# EAGLE board SiNEProduction-Panel (EAGLE 6.1)
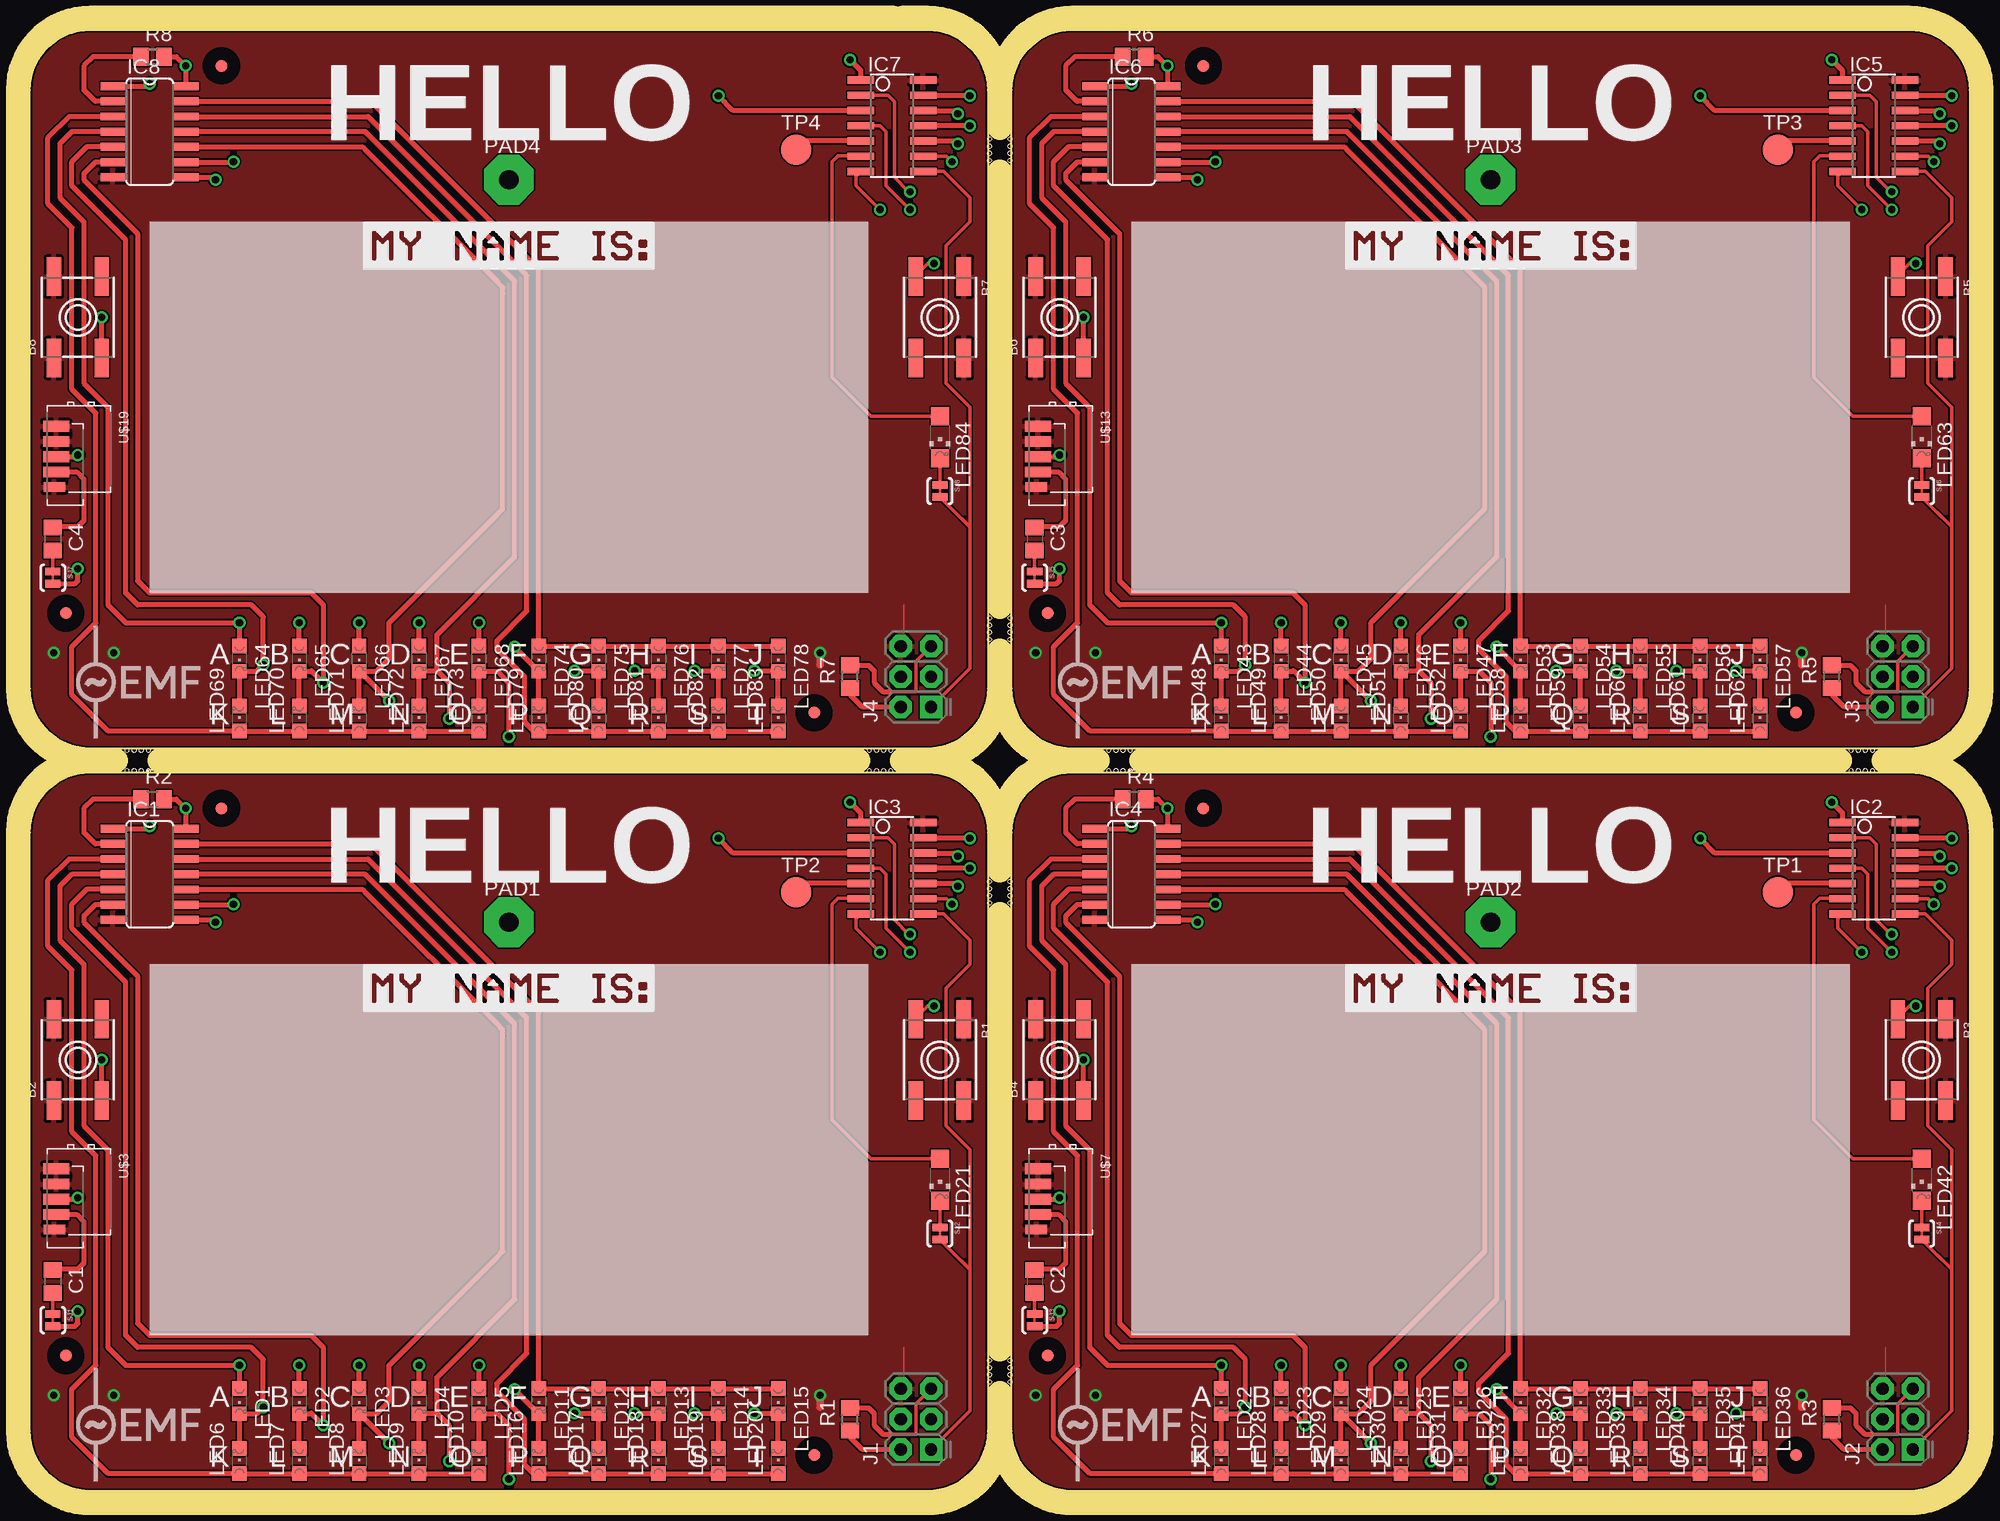
[diagram p0: board, top side]
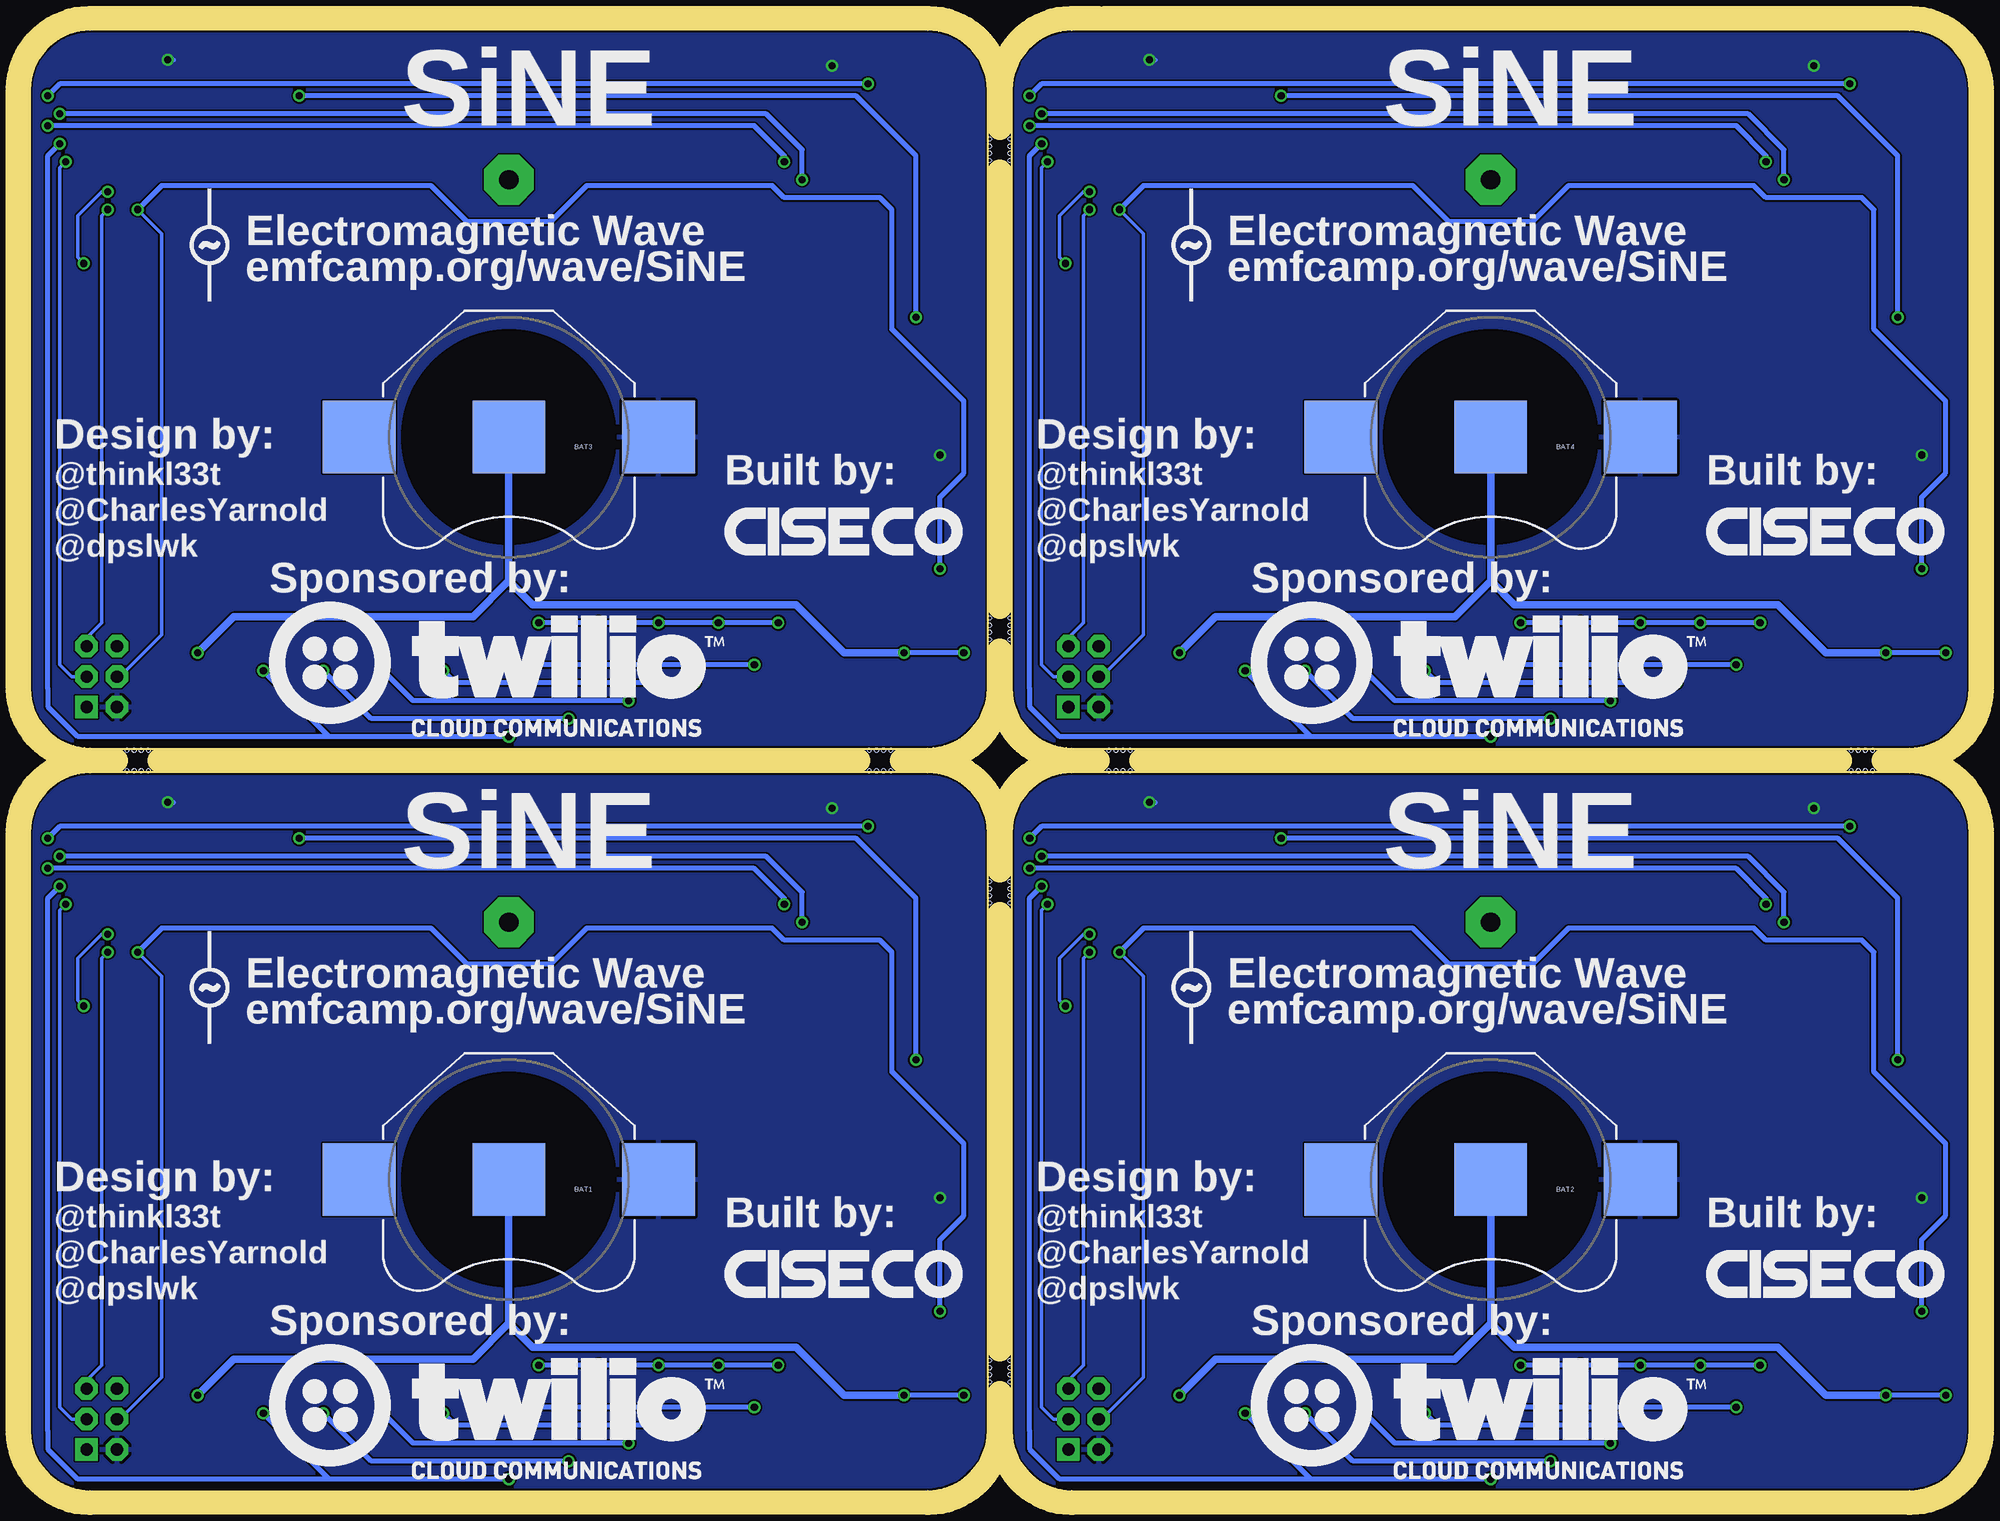
[diagram p1: board, bottom side, seen from below]

Size 162 x 122 mm. Coordinates in mm from the lower left corner, seen from the top.
Outline: 80,55 80,5 arc-90 75,0 5,0 arc-90 0,5 0,55 arc-90 5,60 75,60 arc-90 80,55
Outline: 162,55 162,5 arc-90 157,0 87,0 arc-90 82,5 82,55 arc-90 87,60 157,60 arc-90 162,55
Outline: 162,117 162,67 arc-90 157,62 87,62 arc-90 82,67 82,117 arc-90 87,122 157,122 arc-90 162,117
Outline: 80,117 80,67 arc-90 75,62 5,62 arc-90 0,67 0,117 arc-90 5,122 75,122 arc-90 80,117
Copper layers (1*16): Top 0.035mm / dielectric 1mm / Bottom 0.035mm
Design rules: minimum track width 0.15mm, minimum drill 0.3mm, track to track 0.15mm, track to pad 0.15mm, pad to pad 0.15mm, via to via 0.15mm, smd to smd 0mil, copper to edge 0.15mm, drill to drill 0.15mm, minimum pad ring 10mil, minimum via ring 8mil, stop-mask expansion 4mil, vias tented up to drill 0.61mm, thermal gap 10mil
Holes 0.3 mm at 9.9,60.15 9.3,60.15 8.7,60.15 8.1,60.15 71.9,60.15 71.3,60.15 70.7,60.15 70.1,60.15 80.15,9.1 80.15,9.7 80.15,10.3 80.15,10.9 80.15,49.1 80.15,49.7 80.15,50.3 80.15,50.9 91.9,60.15 91.3,60.15 90.7,60.15 90.1,60.15 153.9,60.15 153.3,60.15 152.7,60.15 152.1,60.15 81.85,50.9 81.85,50.3 81.85,49.7 81.85,49.1 81.85,10.9 81.85,10.3 81.85,9.7 81.85,9.1 8.1,61.85 8.7,61.85 9.3,61.85 9.9,61.85 70.1,61.85 70.7,61.85 71.3,61.85 71.9,61.85 80.15,71.1 80.15,71.7 80.15,72.3 80.15,72.9 80.15,111.1 80.15,111.7 80.15,112.3 80.15,112.9 90.1,61.85 90.7,61.85 91.3,61.85 91.9,61.85 152.1,61.85 152.7,61.85 153.3,61.85 153.9,61.85 81.85,112.9 81.85,112.3 81.85,111.7 81.85,111.1 81.85,72.9 81.85,72.3 81.85,71.7 81.85,71.1
bRestrict: area 31,17 to 49,35; area 113,17 to 131,35; area 113,79 to 131,97; area 31,79 to 49,97
Milling: 39 lines

## Footprints (pad centres in the part's own frame; a part is rotated, then mirrored left to right if it is on the bottom)
EVQ-Q2 = smd 3.2 x 1.2: A -3.4,-2; A' 3.4,-2; B -3.4,2; B' 3.4,2
BATTCON_20MM = smd 6.07 x 6.07: 1 -12.5,0; 2 0,0; 3 12.5,0
C0805 = smd 1.3 x 1.5: 1 -0.95,0; 2 0.95,0
SO14 = smd 0.66 x 2.032: 1 -3.81,-3.073; 2 -2.54,-3.073; 3 -1.27,-3.073; 4 0,-3.073; 5 1.27,-3.073; 6 2.54,-3.073; 7 3.81,-3.073; 8 3.81,3.073; 9 2.54,3.073; 10 1.27,3.073; 11 0,3.073; 12 -1.27,3.073; 13 -2.54,3.073; 14 -3.81,3.073
SOIC14 = smd 0.61 x 2.21: 1 -3.81,-2.603; 2 -2.54,-2.603; 3 -1.27,-2.603; 4 0,-2.603; 5 1.27,-2.603; 6 2.54,-2.603; 7 3.81,-2.603; 8 3.81,2.603; 9 2.54,2.603; 10 1.27,2.603; 11 0,2.603; 12 -1.27,2.603; 13 -2.54,2.603; 14 -3.81,2.603
2X3-NS = drill 1.016 pad 1.88 square: 1 -2.54,-1.27 | drill 1.016 pad 1.88 octagon: 2 -2.54,1.27; 3 0,-1.27; 4 0,1.27; 5 2.54,-1.27; 6 2.54,1.27
FIDUCIAL-1X2.5-STOP = smd 1 x 1: 1 0,0
CHIPLED_0805 = smd 1.2 x 1.2: A 0,-1.05; C 0,1.05
CHIPLED_1206 = smd 1.5 x 1.5: A 0,-1.75; C 0,1.75
4,16O1,6 = drill 1.6 pad 4.166 octagon: 1 0,0
R0805 = smd 1.3 x 1.5: 1 -0.95,0; 2 0.95,0
SJ_2S-TRACE = smd 0.635 x 1.27: 1 -0.508,0; 2 0.508,0
B2,54 = smd 2.54 x 2.54: TP 0,0
TSOP-COMBINED = smd 0.9 x 2.2: 1 -1.905,-2.055; 2 -0.635,-2.055; 3 0.635,-2.055; 4 1.905,-2.055 | smd 0.8 x 1.8: 5 3.175,-2.2

## Placement (x,y rotation side)
B1  SWICTH_SMD  [EVQ-Q2]  76,36 270 top
B2  SWITCH_SMD  [EVQ-Q2]  4,36 90 top
B3  SWICTH_SMD  [EVQ-Q2]  158,36 270 top
B4  SWITCH_SMD  [EVQ-Q2]  86,36 90 top
B5  SWICTH_SMD  [EVQ-Q2]  158,98 270 top
B6  SWITCH_SMD  [EVQ-Q2]  86,98 90 top
B7  SWICTH_SMD  [EVQ-Q2]  76,98 270 top
B8  SWITCH_SMD  [EVQ-Q2]  4,98 90 top
BAT1  [BATTCON_20MM]  122,26 180 bottom
BAT2  [BATTCON_20MM]  40,26 180 bottom
BAT3  [BATTCON_20MM]  122,88 180 bottom
BAT4  [BATTCON_20MM]  40,88 180 bottom
C1  0603 100nF  [C0805]  1.92,17.5 270 top
C2  0603 100nF  [C0805]  83.92,17.5 270 top
C3  0603 100nF  [C0805]  83.92,79.5 270 top
C4  0603 100nF  [C0805]  1.92,79.5 270 top
IC1  74HCT164D  [SO14]  10,51.5 270 top
IC2  ATTINY24/44/84-SSU  [SOIC14]  154,52 270 top
IC3  ATTINY24/44/84-SSU  [SOIC14]  72,52 270 top
IC4  74HCT164D  [SO14]  92,51.5 270 top
IC5  ATTINY24/44/84-SSU  [SOIC14]  154,114 270 top
IC6  74HCT164D  [SO14]  92,113.5 270 top
IC7  ATTINY24/44/84-SSU  [SOIC14]  72,114 270 top
IC8  74HCT164D  [SO14]  10,113.5 270 top
J1  AVR_SPI_PRG_6NS  [2X3-NS]  74,6 90 top
J2  AVR_SPI_PRG_6NS  [2X3-NS]  156,6 90 top
J3  AVR_SPI_PRG_6NS  [2X3-NS]  156,68 90 top
J4  AVR_SPI_PRG_6NS  [2X3-NS]  74,68 90 top
JP1  FIDUCIAL1X2.5-STOP  [FIDUCIAL-1X2.5-STOP]  65.5,3 0 top
JP2  FIDUCIAL1X2.5-STOP  [FIDUCIAL-1X2.5-STOP]  16,57 0 top
JP3  FIDUCIAL1X2.5-STOP  [FIDUCIAL-1X2.5-STOP]  3,11.3 0 top
JP4  FIDUCIAL1X2.5-STOP  [FIDUCIAL-1X2.5-STOP]  147.5,3 0 top
JP5  FIDUCIAL1X2.5-STOP  [FIDUCIAL-1X2.5-STOP]  98,57 0 top
JP6  FIDUCIAL1X2.5-STOP  [FIDUCIAL-1X2.5-STOP]  85,11.3 0 top
JP7  FIDUCIAL1X2.5-STOP  [FIDUCIAL-1X2.5-STOP]  147.5,65 0 top
JP8  FIDUCIAL1X2.5-STOP  [FIDUCIAL-1X2.5-STOP]  98,119 0 top
JP9  FIDUCIAL1X2.5-STOP  [FIDUCIAL-1X2.5-STOP]  85,73.3 0 top
JP10  FIDUCIAL1X2.5-STOP  [FIDUCIAL-1X2.5-STOP]  65.5,65 0 top
JP11  FIDUCIAL1X2.5-STOP  [FIDUCIAL-1X2.5-STOP]  16,119 0 top
JP12  FIDUCIAL1X2.5-STOP  [FIDUCIAL-1X2.5-STOP]  3,73.3 0 top
LED1  0805 LED  [CHIPLED_0805]  17.5,7.5 180 top
LED2  0805 LED  [CHIPLED_0805]  22.5,7.5 180 top
LED3  0805 LED  [CHIPLED_0805]  27.5,7.5 180 top
LED4  0805 LED  [CHIPLED_0805]  32.5,7.5 180 top
LED5  0805 LED  [CHIPLED_0805]  37.5,7.5 180 top
LED6  0805 LED  [CHIPLED_0805]  17.5,2.5 0 top
LED7  0805 LED  [CHIPLED_0805]  22.5,2.5 0 top
LED8  0805 LED  [CHIPLED_0805]  27.5,2.5 0 top
LED9  0805 LED  [CHIPLED_0805]  32.5,2.5 0 top
LED10  0805 LED  [CHIPLED_0805]  37.5,2.5 0 top
LED11  0805 LED  [CHIPLED_0805]  42.5,7.5 180 top
LED12  0805 LED  [CHIPLED_0805]  47.5,7.5 180 top
LED13  0805 LED  [CHIPLED_0805]  52.5,7.5 180 top
LED14  0805 LED  [CHIPLED_0805]  57.5,7.5 180 top
LED15  0805 LED  [CHIPLED_0805]  62.5,7.5 180 top
LED16  0805 LED  [CHIPLED_0805]  42.5,2.5 0 top
LED17  0805 LED  [CHIPLED_0805]  47.5,2.5 0 top
LED18  0805 LED  [CHIPLED_0805]  52.5,2.5 0 top
LED19  0805 LED  [CHIPLED_0805]  57.5,2.5 0 top
LED20  0805 LED  [CHIPLED_0805]  62.5,2.5 0 top
LED21  IR_SENDER  [CHIPLED_1206]  76,26 180 top
LED22  0805 LED  [CHIPLED_0805]  99.5,7.5 180 top
LED23  0805 LED  [CHIPLED_0805]  104.5,7.5 180 top
LED24  0805 LED  [CHIPLED_0805]  109.5,7.5 180 top
LED25  0805 LED  [CHIPLED_0805]  114.5,7.5 180 top
LED26  0805 LED  [CHIPLED_0805]  119.5,7.5 180 top
LED27  0805 LED  [CHIPLED_0805]  99.5,2.5 0 top
LED28  0805 LED  [CHIPLED_0805]  104.5,2.5 0 top
LED29  0805 LED  [CHIPLED_0805]  109.5,2.5 0 top
LED30  0805 LED  [CHIPLED_0805]  114.5,2.5 0 top
LED31  0805 LED  [CHIPLED_0805]  119.5,2.5 0 top
LED32  0805 LED  [CHIPLED_0805]  124.5,7.5 180 top
LED33  0805 LED  [CHIPLED_0805]  129.5,7.5 180 top
LED34  0805 LED  [CHIPLED_0805]  134.5,7.5 180 top
LED35  0805 LED  [CHIPLED_0805]  139.5,7.5 180 top
LED36  0805 LED  [CHIPLED_0805]  144.5,7.5 180 top
LED37  0805 LED  [CHIPLED_0805]  124.5,2.5 0 top
LED38  0805 LED  [CHIPLED_0805]  129.5,2.5 0 top
LED39  0805 LED  [CHIPLED_0805]  134.5,2.5 0 top
LED40  0805 LED  [CHIPLED_0805]  139.5,2.5 0 top
LED41  0805 LED  [CHIPLED_0805]  144.5,2.5 0 top
LED42  IR_SENDER  [CHIPLED_1206]  158,26 180 top
LED43  0805 LED  [CHIPLED_0805]  99.5,69.5 180 top
LED44  0805 LED  [CHIPLED_0805]  104.5,69.5 180 top
LED45  0805 LED  [CHIPLED_0805]  109.5,69.5 180 top
LED46  0805 LED  [CHIPLED_0805]  114.5,69.5 180 top
LED47  0805 LED  [CHIPLED_0805]  119.5,69.5 180 top
LED48  0805 LED  [CHIPLED_0805]  99.5,64.5 0 top
LED49  0805 LED  [CHIPLED_0805]  104.5,64.5 0 top
LED50  0805 LED  [CHIPLED_0805]  109.5,64.5 0 top
LED51  0805 LED  [CHIPLED_0805]  114.5,64.5 0 top
LED52  0805 LED  [CHIPLED_0805]  119.5,64.5 0 top
LED53  0805 LED  [CHIPLED_0805]  124.5,69.5 180 top
LED54  0805 LED  [CHIPLED_0805]  129.5,69.5 180 top
LED55  0805 LED  [CHIPLED_0805]  134.5,69.5 180 top
LED56  0805 LED  [CHIPLED_0805]  139.5,69.5 180 top
LED57  0805 LED  [CHIPLED_0805]  144.5,69.5 180 top
LED58  0805 LED  [CHIPLED_0805]  124.5,64.5 0 top
LED59  0805 LED  [CHIPLED_0805]  129.5,64.5 0 top
LED60  0805 LED  [CHIPLED_0805]  134.5,64.5 0 top
LED61  0805 LED  [CHIPLED_0805]  139.5,64.5 0 top
LED62  0805 LED  [CHIPLED_0805]  144.5,64.5 0 top
LED63  IR_SENDER  [CHIPLED_1206]  158,88 180 top
LED64  0805 LED  [CHIPLED_0805]  17.5,69.5 180 top
LED65  0805 LED  [CHIPLED_0805]  22.5,69.5 180 top
LED66  0805 LED  [CHIPLED_0805]  27.5,69.5 180 top
LED67  0805 LED  [CHIPLED_0805]  32.5,69.5 180 top
LED68  0805 LED  [CHIPLED_0805]  37.5,69.5 180 top
LED69  0805 LED  [CHIPLED_0805]  17.5,64.5 0 top
LED70  0805 LED  [CHIPLED_0805]  22.5,64.5 0 top
LED71  0805 LED  [CHIPLED_0805]  27.5,64.5 0 top
LED72  0805 LED  [CHIPLED_0805]  32.5,64.5 0 top
LED73  0805 LED  [CHIPLED_0805]  37.5,64.5 0 top
LED74  0805 LED  [CHIPLED_0805]  42.5,69.5 180 top
LED75  0805 LED  [CHIPLED_0805]  47.5,69.5 180 top
LED76  0805 LED  [CHIPLED_0805]  52.5,69.5 180 top
LED77  0805 LED  [CHIPLED_0805]  57.5,69.5 180 top
LED78  0805 LED  [CHIPLED_0805]  62.5,69.5 180 top
LED79  0805 LED  [CHIPLED_0805]  42.5,64.5 0 top
LED80  0805 LED  [CHIPLED_0805]  47.5,64.5 0 top
LED81  0805 LED  [CHIPLED_0805]  52.5,64.5 0 top
LED82  0805 LED  [CHIPLED_0805]  57.5,64.5 0 top
LED83  0805 LED  [CHIPLED_0805]  62.5,64.5 0 top
LED84  IR_SENDER  [CHIPLED_1206]  76,88 180 top
PAD1  WIREPAD4,16O1,6  [4,16O1,6]  40,47.5 0 top
PAD2  WIREPAD4,16O1,6  [4,16O1,6]  122,47.5 0 top
PAD3  WIREPAD4,16O1,6  [4,16O1,6]  122,109.5 0 top
PAD4  WIREPAD4,16O1,6  [4,16O1,6]  40,109.5 0 top
R1  0603 10K  [R0805]  68.5,6 90 top
R2  0603 10K  [R0805]  10.23,57.77 0 top
R3  0603 10K  [R0805]  150.5,6 90 top
R4  0603 10K  [R0805]  92.23,57.77 0 top
R5  0603 10K  [R0805]  150.5,68 90 top
R6  0603 10K  [R0805]  92.23,119.77 0 top
R7  0603 10K  [R0805]  68.5,68 90 top
R8  0603 10K  [R0805]  10.23,119.77 0 top
SJ1  SOLDERJUMPERTRACE (NP)  [SJ_2S-TRACE]  1.92,14.27 270 top
SJ2  SOLDERJUMPERTRACE (NP)  [SJ_2S-TRACE]  76,21.5 270 top
SJ3  SOLDERJUMPERTRACE (NP)  [SJ_2S-TRACE]  83.92,14.27 270 top
SJ4  SOLDERJUMPERTRACE (NP)  [SJ_2S-TRACE]  158,21.5 270 top
SJ5  SOLDERJUMPERTRACE (NP)  [SJ_2S-TRACE]  83.92,76.27 270 top
SJ6  SOLDERJUMPERTRACE (NP)  [SJ_2S-TRACE]  158,83.5 270 top
SJ7  SOLDERJUMPERTRACE (NP)  [SJ_2S-TRACE]  1.92,76.27 270 top
SJ8  SOLDERJUMPERTRACE (NP)  [SJ_2S-TRACE]  76,83.5 270 top
TP1  TPB2,54  [B2,54]  146,50 0 top
TP2  TPB2,54  [B2,54]  64,50 0 top
TP3  TPB2,54  [B2,54]  146,112 0 top
TP4  TPB2,54  [B2,54]  64,112 0 top
U$1  [TWILIO]  60,1 0 bottom
U$2  [EMFLOGO1]  65,42 0 bottom
U$3  IR-RECEIVE-COMBINED  [TSOP-COMBINED]  4.25,25 270 top
U$4  [NAME]  40,42 0 top
U$5  [CISECO1]  22,15 0 bottom
U$6  [EMFLOGO]  5.5,5.5 0 top
U$7  IR-RECEIVE-COMBINED  [TSOP-COMBINED]  86.25,25 270 top
U$8  [TWILIO]  142,1 0 bottom
U$9  [CISECO1]  104,15 0 bottom
U$10  [NAME]  122,42 0 top
U$11  [EMFLOGO]  87.5,5.5 0 top
U$12  [EMFLOGO1]  147,42 0 bottom
U$13  IR-RECEIVE-COMBINED  [TSOP-COMBINED]  86.25,87 270 top
U$14  [TWILIO]  142,63 0 bottom
U$15  [CISECO1]  104,77 0 bottom
U$16  [NAME]  122,104 0 top
U$17  [EMFLOGO]  87.5,67.5 0 top
U$18  [EMFLOGO1]  147,104 0 bottom
U$19  IR-RECEIVE-COMBINED  [TSOP-COMBINED]  4.25,87 270 top
U$20  [TWILIO]  60,63 0 bottom
U$21  [CISECO1]  22,77 0 bottom
U$22  [NAME]  40,104 0 top
U$23  [EMFLOGO]  5.5,67.5 0 top
U$24  [EMFLOGO1]  65,104 0 bottom

## Library data of the parts
B1-B8 = microbuilder
BAT1-BAT4 IC1-IC8 TP1-TP4 U$1-U$24 = SiNE Parts
C1-C4 R1-R8 = rcl
J1-J4 = AVR Header
JP1-JP12 = CISECO eaglecad designs
LED1-LED20 LED22-LED41 LED43-LED62 LED64-LED83 = adafruit
LED21 LED42 LED63 LED84 = led
PAD1-PAD4 = wirepad
SJ1-SJ8 = SparkFun

## Nets
BTN1: B1.A IC3.2
BTN2: B2.A IC3.3
BTN3: B4.A IC2.3
BTN4: B3.A IC2.2
BTN5: B6.A IC5.3
BTN6: B5.A IC5.2
BTN7: B8.A IC7.3
BTN8: B7.A IC7.2
GND: B1.B B1.B' B2.B B2.B' BAT2.2 IC1.7 IC3.14 J1.6 U$3.1 U$3.2 U$3.5
GND1: B3.B B3.B' B4.B B4.B' BAT1.2 IC2.14 IC4.7 J2.6 U$7.1 U$7.2 U$7.5
GND2: B5.B B5.B' B6.B B6.B' BAT3.2 IC5.14 IC6.7 J3.6 U$13.1 U$13.2 U$13.5
GND3: B7.B B7.B' B8.B B8.B' BAT4.2 IC7.14 IC8.7 J4.6 U$19.1 U$19.2 U$19.5
IR_IN: C1.2 SJ1.1
IR_IN1: C2.2 SJ3.1
IR_IN2: C3.2 SJ5.1
IR_IN3: C4.2 SJ7.1
IR_OUT: LED21.C SJ2.1
IR_OUT1: LED42.C SJ4.1
IR_OUT2: LED63.C SJ6.1
IR_OUT3: LED84.C SJ8.1
IR_PWM: IC3.6 LED21.A
IR_PWM1: IC2.6 LED42.A
IR_PWM2: IC5.6 LED63.A
IR_PWM3: IC7.6 LED84.A
LED_C1: IC1.5 LED1.C LED6.C LED11.C LED16.C
LED_C2: IC1.6 LED2.C LED7.C LED12.C LED17.C
LED_C3: IC1.10 LED3.C LED8.C LED13.C LED18.C
LED_C4: IC1.11 LED4.C LED9.C LED14.C LED19.C
LED_C5: IC3.10 LED5.C LED10.C LED15.C LED20.C
LED_C6: IC4.6 LED23.C LED28.C LED33.C LED38.C
LED_C7: IC2.10 LED26.C LED31.C LED36.C LED41.C
LED_C8: IC4.10 LED24.C LED29.C LED34.C LED39.C
LED_C9: IC4.11 LED25.C LED30.C LED35.C LED40.C
LED_C10: IC4.5 LED22.C LED27.C LED32.C LED37.C
LED_C11: IC6.6 LED44.C LED49.C LED54.C LED59.C
LED_C12: IC5.10 LED47.C LED52.C LED57.C LED62.C
LED_C13: IC6.10 LED45.C LED50.C LED55.C LED60.C
LED_C14: IC6.11 LED46.C LED51.C LED56.C LED61.C
LED_C15: IC6.5 LED43.C LED48.C LED53.C LED58.C
LED_C16: IC8.6 LED65.C LED70.C LED75.C LED80.C
LED_C17: IC7.10 LED68.C LED73.C LED78.C LED83.C
LED_C18: IC8.10 LED66.C LED71.C LED76.C LED81.C
LED_C19: IC8.11 LED67.C LED72.C LED77.C LED82.C
LED_C20: IC8.5 LED64.C LED69.C LED74.C LED79.C
LED_R1: IC1.4 LED1.A LED2.A LED3.A LED4.A LED5.A
LED_R2: IC1.3 LED6.A LED7.A LED8.A LED9.A LED10.A
LED_R3: IC1.13 LED11.A LED12.A LED13.A LED14.A LED15.A
LED_R4: IC1.12 LED16.A LED17.A LED18.A LED19.A LED20.A
LED_R5: IC4.4 LED22.A LED23.A LED24.A LED25.A LED26.A
LED_R6: IC4.3 LED27.A LED28.A LED29.A LED30.A LED31.A
LED_R7: IC4.13 LED32.A LED33.A LED34.A LED35.A LED36.A
LED_R8: IC4.12 LED37.A LED38.A LED39.A LED40.A LED41.A
LED_R9: IC6.4 LED43.A LED44.A LED45.A LED46.A LED47.A
LED_R10: IC6.3 LED48.A LED49.A LED50.A LED51.A LED52.A
LED_R11: IC6.13 LED53.A LED54.A LED55.A LED56.A LED57.A
LED_R12: IC6.12 LED58.A LED59.A LED60.A LED61.A LED62.A
LED_R13: IC8.4 LED64.A LED65.A LED66.A LED67.A LED68.A
LED_R14: IC8.3 LED69.A LED70.A LED71.A LED72.A LED73.A
LED_R15: IC8.13 LED74.A LED75.A LED76.A LED77.A LED78.A
LED_R16: IC8.12 LED79.A LED80.A LED81.A LED82.A LED83.A
MISO: IC3.8 J1.1 SJ2.2
MISO1: IC2.8 J2.1 SJ4.2
MISO2: IC5.8 J3.1 SJ6.2
MISO3: IC7.8 J4.1 SJ8.2
MOSI: IC3.7 J1.4 SJ1.2
MOSI1: IC2.7 J2.4 SJ3.2
MOSI2: IC5.7 J3.4 SJ5.2
MOSI3: IC7.7 J4.4 SJ7.2
N$1: IC1.2 R2.1
N$2: IC4.2 R4.1
N$3: C2.1 U$7.4
N$4: IC6.2 R6.1
N$5: C3.1 U$13.4
N$6: C1.1 U$3.4
N$7: IC8.2 R8.1
N$8: C4.1 U$19.4
RESET: IC3.4 J1.5 R1.2
RESET1: IC2.4 J2.5 R3.2
RESET2: IC5.4 J3.5 R5.2
RESET3: IC7.4 J4.5 R7.2
SCK: IC3.9 J1.3
SCK1: IC2.9 J2.3
SCK2: IC5.9 J3.3
SCK3: IC7.9 J4.3
SR_A: IC1.1 IC3.13
SR_A1: IC2.13 IC4.1
SR_A2: IC5.13 IC6.1
SR_A3: IC7.13 IC8.1
SR_CLK: IC1.8 IC3.12
SR_CLK1: IC2.12 IC4.8
SR_CLK2: IC5.12 IC6.8
SR_CLK3: IC7.12 IC8.8
SR_CLR: IC1.9 IC3.11
SR_CLR1: IC2.11 IC4.9
SR_CLR2: IC5.11 IC6.9
SR_CLR3: IC7.11 IC8.9
TESTPAD: IC3.5 TP2.TP
TESTPAD1: IC2.5 TP1.TP
TESTPAD2: IC5.5 TP3.TP
TESTPAD3: IC7.5 TP4.TP
VCC: BAT2.1 IC1.14 IC3.1 J1.2 R1.1 R2.2 U$3.3
VCC1: BAT1.1 IC2.1 IC4.14 J2.2 R3.1 R4.2 U$7.3
VCC2: BAT3.1 IC5.1 IC6.14 J3.2 R5.1 R6.2 U$13.3
VCC3: BAT4.1 IC7.1 IC8.14 J4.2 R7.1 R8.2 U$19.3

## Tracks (layer width: path | path; a pad name or v marks a point on that pad's centre or on a via)
BTN1  (via drill 0.6)
  Top 0.305: IC3.2 71.66,54.54 72.2,54 72.2,47.7 73.4,46.5 v73.5,46.5 | v75.5,40.5 75,40.5 74,39.5 B1.A
  Bottom 0.305: v73.5,46.5 74,46.5 76,44.5 76,41 v75.5,40.5
BTN2  (via drill 0.6)
  Top 0.406: B2.A v6,36 | IC3.3 58.73,53.27 v57.5,54.5
  Bottom 0.406: v6,36 6,49.5 11,54.5 v57.5,54.5
BTN3  (via drill 0.6)
  Top 0.406: B4.A v88,36 | IC2.3 140.73,53.27 v139.5,54.5
  Bottom 0.406: v88,36 88,49.5 93,54.5 v139.5,54.5
BTN4  (via drill 0.6)
  Top 0.305: IC2.2 153.66,54.54 154.2,54 154.2,47.7 155.4,46.5 v155.5,46.5 | v157.5,40.5 157,40.5 156,39.5 B3.A
  Bottom 0.305: v155.5,46.5 156,46.5 158,44.5 158,41 v157.5,40.5
BTN5  (via drill 0.6)
  Top 0.406: B6.A v88,98 | IC5.3 140.73,115.27 v139.5,116.5
  Bottom 0.406: v88,98 88,111.5 93,116.5 v139.5,116.5
BTN6  (via drill 0.6)
  Top 0.305: IC5.2 153.66,116.54 154.2,116 154.2,109.7 155.4,108.5 v155.5,108.5 | v157.5,102.5 157,102.5 156,101.5 B5.A
  Bottom 0.305: v155.5,108.5 156,108.5 158,106.5 158,103 v157.5,102.5
BTN7  (via drill 0.6)
  Top 0.406: B8.A v6,98 | IC7.3 58.73,115.27 v57.5,116.5
  Bottom 0.406: v6,98 6,111.5 11,116.5 v57.5,116.5
BTN8  (via drill 0.6)
  Top 0.305: IC7.2 71.66,116.54 72.2,116 72.2,109.7 73.4,108.5 v73.5,108.5 | v75.5,102.5 75,102.5 74,101.5 B7.A
  Bottom 0.305: v73.5,108.5 74,108.5 76,106.5 76,103 v75.5,102.5
GND  (via drill 0.6)
  Top 0: J1.6 73,8.81 73,12
  Top 0.61: v66,8 66,7
  Bottom 0.406: v2,8 v7,8
  Bottom 0.61: 40,14 38,12 16,12 12,8 v7,8 | BAT2.2 40,14 | 40,14 43,11 63,11 v66,8
  pour Top: 0,0 80,0 80,60 0,60
GND1  (via drill 0.6)
  Top 0: J2.6 155,8.81 155,12
  Top 0.61: v148,8 148,7
  Bottom 0.406: v84,8 v89,8
  Bottom 0.61: 122,14 120,12 98,12 94,8 v89,8 | BAT1.2 122,14 | 122,14 125,11 145,11 v148,8
  pour Top: 82,0 162,0 162,60 82,60
GND2  (via drill 0.6)
  Top 0: J3.6 155,70.81 155,74
  Top 0.61: v148,70 148,69
  Bottom 0.406: v84,70 v89,70
  Bottom 0.61: 122,76 120,74 98,74 94,70 v89,70 | BAT3.2 122,76 | 122,76 125,73 145,73 v148,70
  pour Top: 82,62 162,62 162,122 82,122
GND3  (via drill 0.6)
  Top 0: J4.6 73,70.81 73,74
  Top 0.61: v66,70 66,69
  Bottom 0.406: v2,70 v7,70
  Bottom 0.61: 40,76 38,74 16,74 12,70 v7,70 | BAT4.2 40,76 | 40,76 43,73 63,73 v66,70
  pour Top: 0,62 80,62 80,122 0,122
IR_IN
  Top 0.305: SJ1.1 C1.2
IR_IN1
  Top 0.305: SJ3.1 C2.2
IR_IN2
  Top 0.305: SJ5.1 C3.2
IR_IN3
  Top 0.305: SJ7.1 C4.2
IR_OUT
  Top 0.305: LED21.C SJ2.1
IR_OUT1
  Top 0.305: LED42.C SJ4.1
IR_OUT2
  Top 0.305: LED63.C SJ6.1
IR_OUT3
  Top 0.305: LED84.C SJ8.1
IR_PWM
  Top 0.305: LED21.A 70.25,27.75 67,31 67,49 67.5,49.5 69.36,49.5 IC3.6
IR_PWM1
  Top 0.305: LED42.A 152.25,27.75 149,31 149,49 149.5,49.5 151.36,49.5 IC2.6
IR_PWM2
  Top 0.305: LED63.A 152.25,89.75 149,93 149,111 149.5,111.5 151.36,111.5 IC5.6
IR_PWM3
  Top 0.305: LED84.A 70.25,89.75 67,93 67,111 67.5,111.5 69.36,111.5 IC7.6
LED_C1  (via drill 0.6)
  Top 0.406: LED16.C LED11.C 40.5,8.45 v40.5,8.5 | LED6.C LED1.C 18.95,6.45 v19.5,7 19.5,11 18.5,12 9,12 8,13 8,42.5 4,46.5 3.5,47 3.5,49 4.73,50.23 IC1.5
  Bottom 0.406: v19.5,7 35.5,7 39,7 v40.5,8.5
LED_C2  (via drill 0.6)
  Top 0.406: LED17.C LED12.C 47.45,6.5 v45.5,6.5 | LED7.C LED2.C | LED2.C 23.55,6.45 v24.5,5.5 24.5,12 23.5,13 10,13 9,14 9,43 4.5,47.5 4.5,48 5.46,48.96 IC1.6 | LED2.C 23.45,6.45 23.5,6.5
  Bottom 0.406: v24.5,5.5 44.5,5.5 v45.5,6.5
LED_C3  (via drill 0.6)
  Top 0.406: LED18.C LED13.C 52.45,6.5 v50.5,6.5 | LED8.C LED3.C | LED3.C 27.55,6.45 v30,4 | LED3.C 28.95,6.45 30,7.5 30,10.5 39,19.5 39.5,20 39.5,38 39.5,38.5 39,39 28,50 27.77,50.23 IC1.10
  Bottom 0.406: v30,4 48,4 v50.5,6.5
LED_C4  (via drill 0.6)
  Top 0.406: LED19.C LED14.C 57.45,6.5 v55.5,6.5 | LED9.C LED4.C 32.55,6.5 34,6.5 | 34,6.5 35,5.5 v35,2.5 | 34,6.5 34,9.5 40.5,16 40.5,39 28,51.5 IC1.11
  Bottom 0.406: v35,2.5 51.5,2.5 v55.5,6.5
LED_C5  (via drill 0.6)
  Top 0.406: LED20.C LED15.C 62.45,6.5 v60.5,6.5 | LED10.C LED5.C 39.05,6.45 39.5,6 40,5.5 v40,1 | IC3.10 77.27,50.73 v77.5,50.5
  Bottom 0.406: v40,1 55,1 | 55,1 v60.5,6.5 | 55,1 74.5,1 76,1 78,3 78.5,3.5 78.5,5 78.5,49.5 78,50 | 78,50 v77.5,50.5 78,50
LED_C6  (via drill 0.6)
  Top 0.406: LED38.C LED33.C 129.45,6.5 v127.5,6.5 | LED28.C LED23.C | LED23.C 105.55,6.45 v106.5,5.5 106.5,12 105.5,13 92,13 91,14 91,43 86.5,47.5 86.5,48 87.46,48.96 IC4.6 | LED23.C 105.45,6.45 105.5,6.5
  Bottom 0.406: v106.5,5.5 126.5,5.5 v127.5,6.5
LED_C7  (via drill 0.6)
  Top 0.406: LED41.C LED36.C 144.45,6.5 v142.5,6.5 | LED31.C LED26.C 121.05,6.45 121.5,6 122,5.5 v122,1 | IC2.10 159.27,50.73 v159.5,50.5
  Bottom 0.406: v122,1 137,1 | 137,1 v142.5,6.5 | 137,1 156.5,1 158,1 160,3 160.5,3.5 160.5,5 160.5,49.5 160,50 | 160,50 v159.5,50.5 160,50
LED_C8  (via drill 0.6)
  Top 0.406: LED39.C LED34.C 134.45,6.5 v132.5,6.5 | LED29.C LED24.C | LED24.C 109.55,6.45 v112,4 | LED24.C 110.95,6.45 112,7.5 112,10.5 121,19.5 121.5,20 121.5,38 121.5,38.5 121,39 110,50 109.77,50.23 IC4.10
  Bottom 0.406: v112,4 130,4 v132.5,6.5
LED_C9  (via drill 0.6)
  Top 0.406: LED40.C LED35.C 139.45,6.5 v137.5,6.5 | LED30.C LED25.C 114.55,6.5 116,6.5 | 116,6.5 117,5.5 v117,2.5 | 116,6.5 116,9.5 122.5,16 122.5,39 110,51.5 IC4.11
  Bottom 0.406: v117,2.5 133.5,2.5 v137.5,6.5
LED_C10  (via drill 0.6)
  Top 0.406: LED37.C LED32.C 122.5,8.45 v122.5,8.5 | LED27.C LED22.C 100.95,6.45 v101.5,7 101.5,11 100.5,12 91,12 90,13 90,42.5 86,46.5 85.5,47 85.5,49 86.73,50.23 IC4.5
  Bottom 0.406: v101.5,7 117.5,7 121,7 v122.5,8.5
LED_C11  (via drill 0.6)
  Top 0.406: LED59.C LED54.C 129.45,68.5 v127.5,68.5 | LED49.C LED44.C | LED44.C 105.55,68.45 v106.5,67.5 106.5,74 105.5,75 92,75 91,76 91,105 86.5,109.5 86.5,110 87.46,110.96 IC6.6 | LED44.C 105.45,68.45 105.5,68.5
  Bottom 0.406: v106.5,67.5 126.5,67.5 v127.5,68.5
LED_C12  (via drill 0.6)
  Top 0.406: LED62.C LED57.C 144.45,68.5 v142.5,68.5 | LED52.C LED47.C 121.05,68.45 121.5,68 122,67.5 v122,63 | IC5.10 159.27,112.73 v159.5,112.5
  Bottom 0.406: v122,63 137,63 | 137,63 v142.5,68.5 | 137,63 156.5,63 158,63 160,65 160.5,65.5 160.5,67 160.5,111.5 160,112 | 160,112 v159.5,112.5 160,112
LED_C13  (via drill 0.6)
  Top 0.406: LED60.C LED55.C 134.45,68.5 v132.5,68.5 | LED50.C LED45.C | LED45.C 109.55,68.45 v112,66 | LED45.C 110.95,68.45 112,69.5 112,72.5 121,81.5 121.5,82 121.5,100 121.5,100.5 121,101 110,112 109.77,112.23 IC6.10
  Bottom 0.406: v112,66 130,66 v132.5,68.5
LED_C14  (via drill 0.6)
  Top 0.406: LED61.C LED56.C 139.45,68.5 v137.5,68.5 | LED51.C LED46.C 114.55,68.5 116,68.5 | 116,68.5 117,67.5 v117,64.5 | 116,68.5 116,71.5 122.5,78 122.5,101 110,113.5 IC6.11
  Bottom 0.406: v117,64.5 133.5,64.5 v137.5,68.5
LED_C15  (via drill 0.6)
  Top 0.406: LED58.C LED53.C 122.5,70.45 v122.5,70.5 | LED48.C LED43.C 100.95,68.45 v101.5,69 101.5,73 100.5,74 91,74 90,75 90,104.5 86,108.5 85.5,109 85.5,111 86.73,112.23 IC6.5
  Bottom 0.406: v101.5,69 117.5,69 121,69 v122.5,70.5
LED_C16  (via drill 0.6)
  Top 0.406: LED80.C LED75.C 47.45,68.5 v45.5,68.5 | LED70.C LED65.C | LED65.C 23.55,68.45 v24.5,67.5 24.5,74 23.5,75 10,75 9,76 9,105 4.5,109.5 4.5,110 5.46,110.96 IC8.6 | LED65.C 23.45,68.45 23.5,68.5
  Bottom 0.406: v24.5,67.5 44.5,67.5 v45.5,68.5
LED_C17  (via drill 0.6)
  Top 0.406: LED83.C LED78.C 62.45,68.5 v60.5,68.5 | LED73.C LED68.C 39.05,68.45 39.5,68 40,67.5 v40,63 | IC7.10 77.27,112.73 v77.5,112.5
  Bottom 0.406: v40,63 55,63 | 55,63 v60.5,68.5 | 55,63 74.5,63 76,63 78,65 78.5,65.5 78.5,67 78.5,111.5 78,112 | 78,112 v77.5,112.5 78,112
LED_C18  (via drill 0.6)
  Top 0.406: LED81.C LED76.C 52.45,68.5 v50.5,68.5 | LED71.C LED66.C | LED66.C 27.55,68.45 v30,66 | LED66.C 28.95,68.45 30,69.5 30,72.5 39,81.5 39.5,82 39.5,100 39.5,100.5 39,101 28,112 27.77,112.23 IC8.10
  Bottom 0.406: v30,66 48,66 v50.5,68.5
LED_C19  (via drill 0.6)
  Top 0.406: LED82.C LED77.C 57.45,68.5 v55.5,68.5 | LED72.C LED67.C 32.55,68.5 34,68.5 | 34,68.5 35,67.5 v35,64.5 | 34,68.5 34,71.5 40.5,78 40.5,101 28,113.5 IC8.11
  Bottom 0.406: v35,64.5 51.5,64.5 v55.5,68.5
LED_C20  (via drill 0.6)
  Top 0.406: LED79.C LED74.C 40.5,70.45 v40.5,70.5 | LED69.C LED64.C 18.95,68.45 v19.5,69 19.5,73 18.5,74 9,74 8,75 8,104.5 4,108.5 3.5,109 3.5,111 4.73,112.23 IC8.5
  Bottom 0.406: v19.5,69 35.5,69 39,69 v40.5,70.5
LED_R1  (via drill 0.6)
  Top 0.406: LED5.A v37.5,10.5 | LED4.A v32.5,10.5 | LED3.A v27.5,10.5 | LED2.A v22.5,10.5 | LED1.A v17.5,10.5 8,10.5 6.5,12 6.5,28.5 4.5,30.5 4.5,44 2.5,46 2.5,50.5 3.5,51.5 IC1.4
  Bottom 0.406: v17.5,10.5 v22.5,10.5 v27.5,10.5 v32.5,10.5 v37.5,10.5
LED_R2
  Top 0.406: LED10.A LED9.A LED8.A LED7.A LED6.A 6.55,1.45 3.5,4.5 3.5,8.5 5.5,10.5 5.5,28 3.5,30 3.5,43.5 1.5,45.5 1.5,51 3.27,52.77 IC1.3
LED_R3
  Top 0.406: LED15.A LED14.A LED13.A LED12.A LED11.A 42.5,40 28.5,54 13.11,54 IC1.13
LED_R4
  Top 0.406: LED20.A LED19.A LED18.A LED17.A LED16.A 42.05,1.45 41.3,2.2 41.3,6 39,8.3 39,9 41.5,11.5 41.5,39.5 28.23,52.77 IC1.12
LED_R5  (via drill 0.6)
  Top 0.406: LED26.A v119.5,10.5 | LED25.A v114.5,10.5 | LED24.A v109.5,10.5 | LED23.A v104.5,10.5 | LED22.A v99.5,10.5 90,10.5 88.5,12 88.5,28.5 86.5,30.5 86.5,44 84.5,46 84.5,50.5 85.5,51.5 IC4.4
  Bottom 0.406: v99.5,10.5 v104.5,10.5 v109.5,10.5 v114.5,10.5 v119.5,10.5
LED_R6
  Top 0.406: LED31.A LED30.A LED29.A LED28.A LED27.A 88.55,1.45 85.5,4.5 85.5,8.5 87.5,10.5 87.5,28 85.5,30 85.5,43.5 83.5,45.5 83.5,51 85.27,52.77 IC4.3
LED_R7
  Top 0.406: LED36.A LED35.A LED34.A LED33.A LED32.A 124.5,40 110.5,54 95.11,54 IC4.13
LED_R8
  Top 0.406: LED41.A LED40.A LED39.A LED38.A LED37.A 124.05,1.45 123.3,2.2 123.3,6 121,8.3 121,9 123.5,11.5 123.5,39.5 110.23,52.77 IC4.12
LED_R9  (via drill 0.6)
  Top 0.406: LED47.A v119.5,72.5 | LED46.A v114.5,72.5 | LED45.A v109.5,72.5 | LED44.A v104.5,72.5 | LED43.A v99.5,72.5 90,72.5 88.5,74 88.5,90.5 86.5,92.5 86.5,106 84.5,108 84.5,112.5 85.5,113.5 IC6.4
  Bottom 0.406: v99.5,72.5 v104.5,72.5 v109.5,72.5 v114.5,72.5 v119.5,72.5
LED_R10
  Top 0.406: LED52.A LED51.A LED50.A LED49.A LED48.A 88.55,63.45 85.5,66.5 85.5,70.5 87.5,72.5 87.5,90 85.5,92 85.5,105.5 83.5,107.5 83.5,113 85.27,114.77 IC6.3
LED_R11
  Top 0.406: LED57.A LED56.A LED55.A LED54.A LED53.A 124.5,102 110.5,116 95.11,116 IC6.13
LED_R12
  Top 0.406: LED62.A LED61.A LED60.A LED59.A LED58.A 124.05,63.45 123.3,64.2 123.3,68 121,70.3 121,71 123.5,73.5 123.5,101.5 110.23,114.77 IC6.12
LED_R13  (via drill 0.6)
  Top 0.406: LED68.A v37.5,72.5 | LED67.A v32.5,72.5 | LED66.A v27.5,72.5 | LED65.A v22.5,72.5 | LED64.A v17.5,72.5 8,72.5 6.5,74 6.5,90.5 4.5,92.5 4.5,106 2.5,108 2.5,112.5 3.5,113.5 IC8.4
  Bottom 0.406: v17.5,72.5 v22.5,72.5 v27.5,72.5 v32.5,72.5 v37.5,72.5
LED_R14
  Top 0.406: LED73.A LED72.A LED71.A LED70.A LED69.A 6.55,63.45 3.5,66.5 3.5,70.5 5.5,72.5 5.5,90 3.5,92 3.5,105.5 1.5,107.5 1.5,113 3.27,114.77 IC8.3
LED_R15
  Top 0.406: LED78.A LED77.A LED76.A LED75.A LED74.A 42.5,102 28.5,116 13.11,116 IC8.13
LED_R16
  Top 0.406: LED83.A LED82.A LED81.A LED80.A LED79.A 42.05,63.45 41.3,64.2 41.3,68 39,70.3 39,71 41.5,73.5 41.5,101.5 28.23,114.77 IC8.12
MISO
  Top 0.305: J1.1 78.5,6.69 78.5,18.5 | 78.5,18.5 77.01,19.99 SJ2.2 78.49,18.5 78.5,18.5 | 78.5,18.5 78.5,28.5 76.5,30.5 76.5,42 78.5,44 78.5,46 76.31,48.19 IC3.8
MISO1
  Top 0.305: J2.1 160.5,6.69 160.5,18.5 | 160.5,18.5 159.01,19.99 SJ4.2 160.49,18.5 160.5,18.5 | 160.5,18.5 160.5,28.5 158.5,30.5 158.5,42 160.5,44 160.5,46 158.31,48.19 IC2.8
MISO2
  Top 0.305: J3.1 160.5,68.69 160.5,80.5 | 160.5,80.5 159.01,81.99 SJ6.2 160.49,80.5 160.5,80.5 | 160.5,80.5 160.5,90.5 158.5,92.5 158.5,104 160.5,106 160.5,108 158.31,110.19 IC5.8
MISO3
  Top 0.305: J4.1 78.5,68.69 78.5,80.5 | 78.5,80.5 77.01,81.99 SJ8.2 78.49,80.5 78.5,80.5 | 78.5,80.5 78.5,90.5 76.5,92.5 76.5,104 78.5,106 78.5,108 76.31,110.19 IC7.8
MOSI  (via drill 0.6)
  Top 0.305: 69.5,48.09 IC3.7 69,47.79 69,47 v71,45
  Top 0.406: SJ1.2 3.76,13.76 4,14 v4,15
  Bottom 0.305: J1.4 72.5,6 69,9.5 69,43 v71,45
  Bottom 0.406: v4,15 4,21 2,23 2,29 8,35 8,45 9,46 17,46 18,47 33.5,47 36.5,44 43.5,44 46.5,47 69,47 v71,45
MOSI1  (via drill 0.6)
  Top 0.305: 151.5,48.09 IC2.7 151,47.79 151,47 v153,45
  Top 0.406: SJ3.2 85.76,13.76 86,14 v86,15
  Bottom 0.305: J2.4 154.5,6 151,9.5 151,43 v153,45
  Bottom 0.406: v86,15 86,21 84,23 84,29 90,35 90,45 91,46 99,46 100,47 115.5,47 118.5,44 125.5,44 128.5,47 151,47 v153,45
MOSI2  (via drill 0.6)
  Top 0.305: 151.5,110.09 IC5.7 151,109.79 151,109 v153,107
  Top 0.406: SJ5.2 85.76,75.76 86,76 v86,77
  Bottom 0.305: J3.4 154.5,68 151,71.5 151,105 v153,107
  Bottom 0.406: v86,77 86,83 84,85 84,91 90,97 90,107 91,108 99,108 100,109 115.5,109 118.5,106 125.5,106 128.5,109 151,109 v153,107
MOSI3  (via drill 0.6)
  Top 0.305: 69.5,110.09 IC7.7 69,109.79 69,109 v71,107
  Top 0.406: SJ7.2 3.76,75.76 4,76 v4,77
  Bottom 0.305: J4.4 72.5,68 69,71.5 69,105 v71,107
  Bottom 0.406: v4,77 4,83 2,85 2,91 8,97 8,107 9,108 17,108 18,109 33.5,109 36.5,106 43.5,106 46.5,109 69,109 v71,107
N$1
  Top 0.406: IC1.2 5.46,54.04 4.5,55 4.5,57 5.27,57.77 R2.1
N$2
  Top 0.406: IC4.2 87.46,54.04 86.5,55 86.5,57 87.27,57.77 R4.1
N$3
  Top 0.406: U$7.4 85.91,23.09 86.5,22.5 86.5,19 86,18.5 83.97,18.5 C2.1
N$4
  Top 0.406: IC6.2 87.46,116.04 86.5,117 86.5,119 87.27,119.77 R6.1
N$5
  Top 0.406: U$13.4 85.91,85.09 86.5,84.5 86.5,81 86,80.5 83.97,80.5 C3.1
N$6
  Top 0.406: U$3.4 3.9,23.09 4.5,22.5 4.5,19 4,18.5 1.97,18.5 C1.1
N$7
  Top 0.406: IC8.2 5.46,116.04 4.5,117 4.5,119 5.27,119.77 R8.1
N$8
  Top 0.406: U$19.4 3.9,85.09 4.5,84.5 4.5,81 4,80.5 1.97,80.5 C4.1
RESET  (via drill 0.6)
  Top 0.305: 71.75,4.75 74,4.75 74,7.27 J1.5 | v73.5,45 71.5,47 71.5,51.5 71,52 IC3.4
  Top 0.406: R1.2 70.05,6.95 70.5,6.5 70.5,5.5 71.25,4.75 71.75,4.75
  Bottom 0.305: J1.5 75.27,9.23 74,10.5 74,44.5 v73.5,45
RESET1  (via drill 0.6)
  Top 0.305: 153.75,4.75 156,4.75 156,7.27 J2.5 | v155.5,45 153.5,47 153.5,51.5 153,52 IC2.4
  Top 0.406: R3.2 152.05,6.95 152.5,6.5 152.5,5.5 153.25,4.75 153.75,4.75
  Bottom 0.305: J2.5 157.27,9.23 156,10.5 156,44.5 v155.5,45
RESET2  (via drill 0.6)
  Top 0.305: 153.75,66.75 156,66.75 156,69.27 J3.5 | v155.5,107 153.5,109 153.5,113.5 153,114 IC5.4
  Top 0.406: R5.2 152.05,68.95 152.5,68.5 152.5,67.5 153.25,66.75 153.75,66.75
  Bottom 0.305: J3.5 157.27,71.23 156,72.5 156,106.5 v155.5,107
RESET3  (via drill 0.6)
  Top 0.305: 71.75,66.75 74,66.75 74,69.27 J4.5 | v73.5,107 71.5,109 71.5,113.5 71,114 IC7.4
  Top 0.406: R7.2 70.05,68.95 70.5,68.5 70.5,67.5 71.25,66.75 71.75,66.75
  Bottom 0.305: J4.5 75.27,71.23 74,72.5 74,106.5 v73.5,107
SCK  (via drill 0.6)
  Top 0.305: IC3.9 76.54,49.46 v77,49
  Bottom 0.305: J1.3 76.5,6 77.5,7 77.5,48.5 v77,49
SCK1  (via drill 0.6)
  Top 0.305: IC2.9 158.54,49.46 v159,49
  Bottom 0.305: J2.3 158.5,6 159.5,7 159.5,48.5 v159,49
SCK2  (via drill 0.6)
  Top 0.305: IC5.9 158.54,111.46 v159,111
  Bottom 0.305: J3.3 158.5,68 159.5,69 159.5,110.5 v159,111
SCK3  (via drill 0.6)
  Top 0.305: IC7.9 76.54,111.46 v77,111
  Bottom 0.305: J4.3 76.5,68 77.5,69 77.5,110.5 v77,111
SR_A  (via drill 0.6)
  Top 0.406: IC1.1 9.81,55.31 v10,55.5 | v78.5,54.5 75.5,54.5 75.56,54.5 IC3.13
  Bottom 0.406: v10,55.5 77.5,55.5 v78.5,54.5
SR_A1  (via drill 0.6)
  Top 0.406: IC4.1 91.81,55.31 v92,55.5 | v160.5,54.5 157.5,54.5 157.56,54.5 IC2.13
  Bottom 0.406: v92,55.5 159.5,55.5 v160.5,54.5
SR_A2  (via drill 0.6)
  Top 0.406: IC6.1 91.81,117.31 v92,117.5 | v160.5,116.5 157.5,116.5 157.56,116.5 IC5.13
  Bottom 0.406: v92,117.5 159.5,117.5 v160.5,116.5
SR_A3  (via drill 0.6)
  Top 0.406: IC8.1 9.81,117.31 v10,117.5 | v78.5,116.5 75.5,116.5 75.56,116.5 IC7.13
  Bottom 0.406: v10,117.5 77.5,117.5 v78.5,116.5
SR_CLK  (via drill 0.6)
  Top 0.406: IC1.8 15.31,47.69 v15.5,47.5 | IC3.12 77.23,53.27 v77.5,53
  Bottom 0.406: v15.5,47.5 15.5,50 18.5,53 v77.5,53
SR_CLK1  (via drill 0.6)
  Top 0.406: IC4.8 97.31,47.69 v97.5,47.5 | IC2.12 159.23,53.27 v159.5,53
  Bottom 0.406: v97.5,47.5 97.5,50 100.5,53 v159.5,53
SR_CLK2  (via drill 0.6)
  Top 0.406: IC6.8 97.31,109.69 v97.5,109.5 | IC5.12 159.23,115.27 v159.5,115
  Bottom 0.406: v97.5,109.5 97.5,112 100.5,115 v159.5,115
SR_CLK3  (via drill 0.6)
  Top 0.406: IC8.8 15.31,109.69 v15.5,109.5 | IC7.12 77.23,115.27 v77.5,115
  Bottom 0.406: v15.5,109.5 15.5,112 18.5,115 v77.5,115
SR_CLR  (via drill 0.6)
  Top 0.406: IC1.9 16.96,48.96 v17,49 | v78.5,52 IC3.11
  Bottom 0.406: v17,49 17,49.5 19.5,52 v78.5,52
SR_CLR1  (via drill 0.6)
  Top 0.406: IC4.9 98.96,48.96 v99,49 | v160.5,52 IC2.11
  Bottom 0.406: v99,49 99,49.5 101.5,52 v160.5,52
SR_CLR2  (via drill 0.6)
  Top 0.406: IC6.9 98.96,110.96 v99,111 | v160.5,114 IC5.11
  Bottom 0.406: v99,111 99,111.5 101.5,114 v160.5,114
SR_CLR3  (via drill 0.6)
  Top 0.406: IC8.9 16.96,110.96 v17,111 | v78.5,114 IC7.11
  Bottom 0.406: v17,111 17,111.5 19.5,114 v78.5,114
TESTPAD
  Top 0.406: IC3.5 64.73,50.73 TP2.TP
TESTPAD1
  Top 0.406: IC2.5 146.73,50.73 TP1.TP
TESTPAD2
  Top 0.406: IC5.5 146.73,112.73 TP3.TP
TESTPAD3
  Top 0.406: IC7.5 64.73,112.73 TP4.TP
VCC  (via drill 0.6)
  Top 0.406: R2.2 12.23,57.77 v13,57 13,55.38 IC1.14 | IC3.1 69.4,56.6 v68.5,57.5 | R1.1 68.5,4.5 69.5,3.5 72.69,3.5 J1.2 | U$3.3 4,24.36 v4,24.5
  Bottom 0.406: v68.5,57.5 68,57.5
  pour Bottom: 0,0 80,0 80,60 0,60
VCC1  (via drill 0.6)
  Top 0.406: R4.2 94.23,57.77 v95,57 95,55.38 IC4.14 | IC2.1 151.4,56.6 v150.5,57.5 | R3.1 150.5,4.5 151.5,3.5 154.69,3.5 J2.2 | U$7.3 86,24.36 v86,24.5
  Bottom 0.406: v150.5,57.5 150,57.5
  pour Bottom: 82,0 162,0 162,60 82,60
VCC2  (via drill 0.6)
  Top 0.406: R6.2 94.23,119.77 v95,119 95,117.38 IC6.14 | IC5.1 151.4,118.6 v150.5,119.5 | R5.1 150.5,66.5 151.5,65.5 154.69,65.5 J3.2 | U$13.3 86,86.36 v86,86.5
  Bottom 0.406: v150.5,119.5 150,119.5
  pour Bottom: 82,62 162,62 162,122 82,122
VCC3  (via drill 0.6)
  Top 0.406: R8.2 12.23,119.77 v13,119 13,117.38 IC8.14 | IC7.1 69.4,118.6 v68.5,119.5 | R7.1 68.5,66.5 69.5,65.5 72.69,65.5 J4.2 | U$19.3 4,86.36 v4,86.5
  Bottom 0.406: v68.5,119.5 68,119.5
  pour Bottom: 0,62 80,62 80,122 0,122

## Text on the board
tPlace: HELLO | HELLO | A | B | C | D | E | F | G | H | I | J | A | B | C | D | E | F | G | H | I | J | K | L | M | N | O | P | Q | R | S | T | K | L | M | N | O | P | Q | R | S | T | HELLO | HELLO | A | B | C | D | E | F | G | H | I | J | A | B | C | D | E | F | G | H | I | J | K | L | M | N | O | P | Q | R | S | T | K | L | M | N | O | P | Q | R | S | T
bPlace: SiNE | SiNE | Electromagnetic Wave | Electromagnetic Wave | emfcamp.org/wave/SiNE | emfcamp.org/wave/SiNE | Design by: | Design by: | Built by: | @thinkl33t | Built by: | @thinkl33t | @CharlesYarnold | @CharlesYarnold | @dpslwk | @dpslwk | Sponsored by: | Sponsored by: | SiNE | SiNE | Electromagnetic Wave | Electromagnetic Wave | emfcamp.org/wave/SiNE | emfcamp.org/wave/SiNE | Design by: | Design by: | Built by: | @thinkl33t | Built by: | @thinkl33t | @CharlesYarnold | @CharlesYarnold | @dpslwk | @dpslwk | Sponsored by: | Sponsored by: